# EAGLE board FOURCHANNEL REAY DRIVER (EAGLE 6.1)
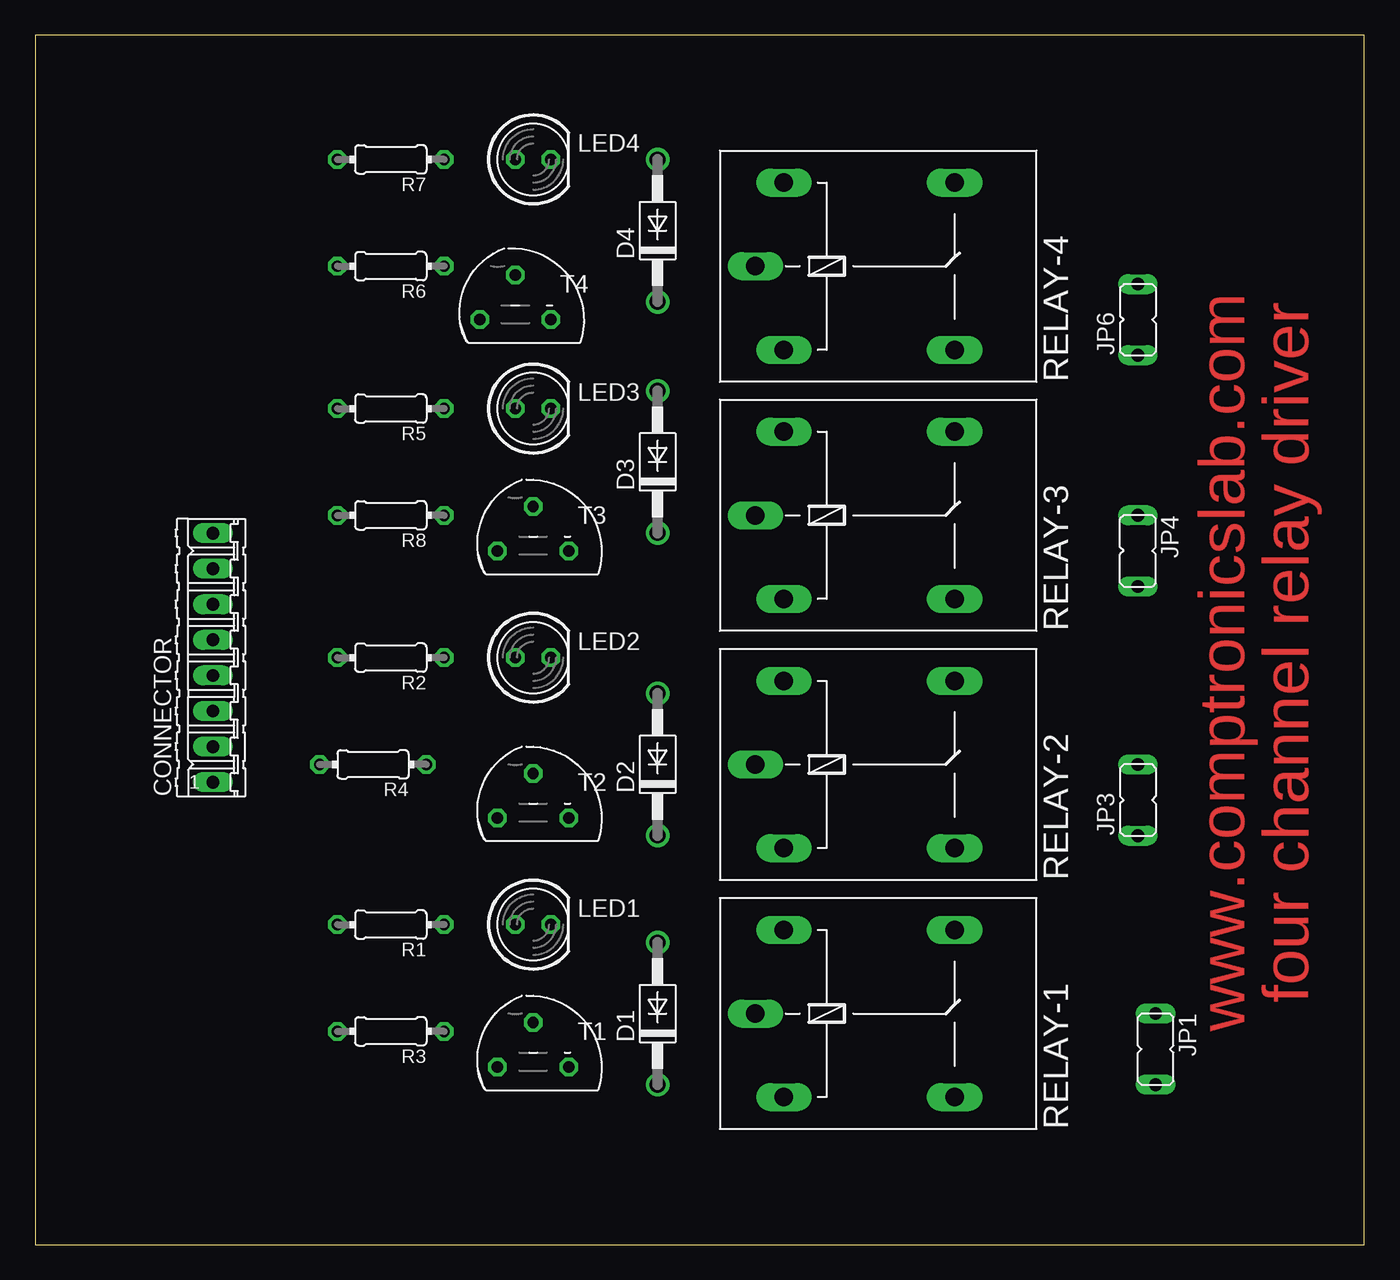
[diagram p0: board, top side]
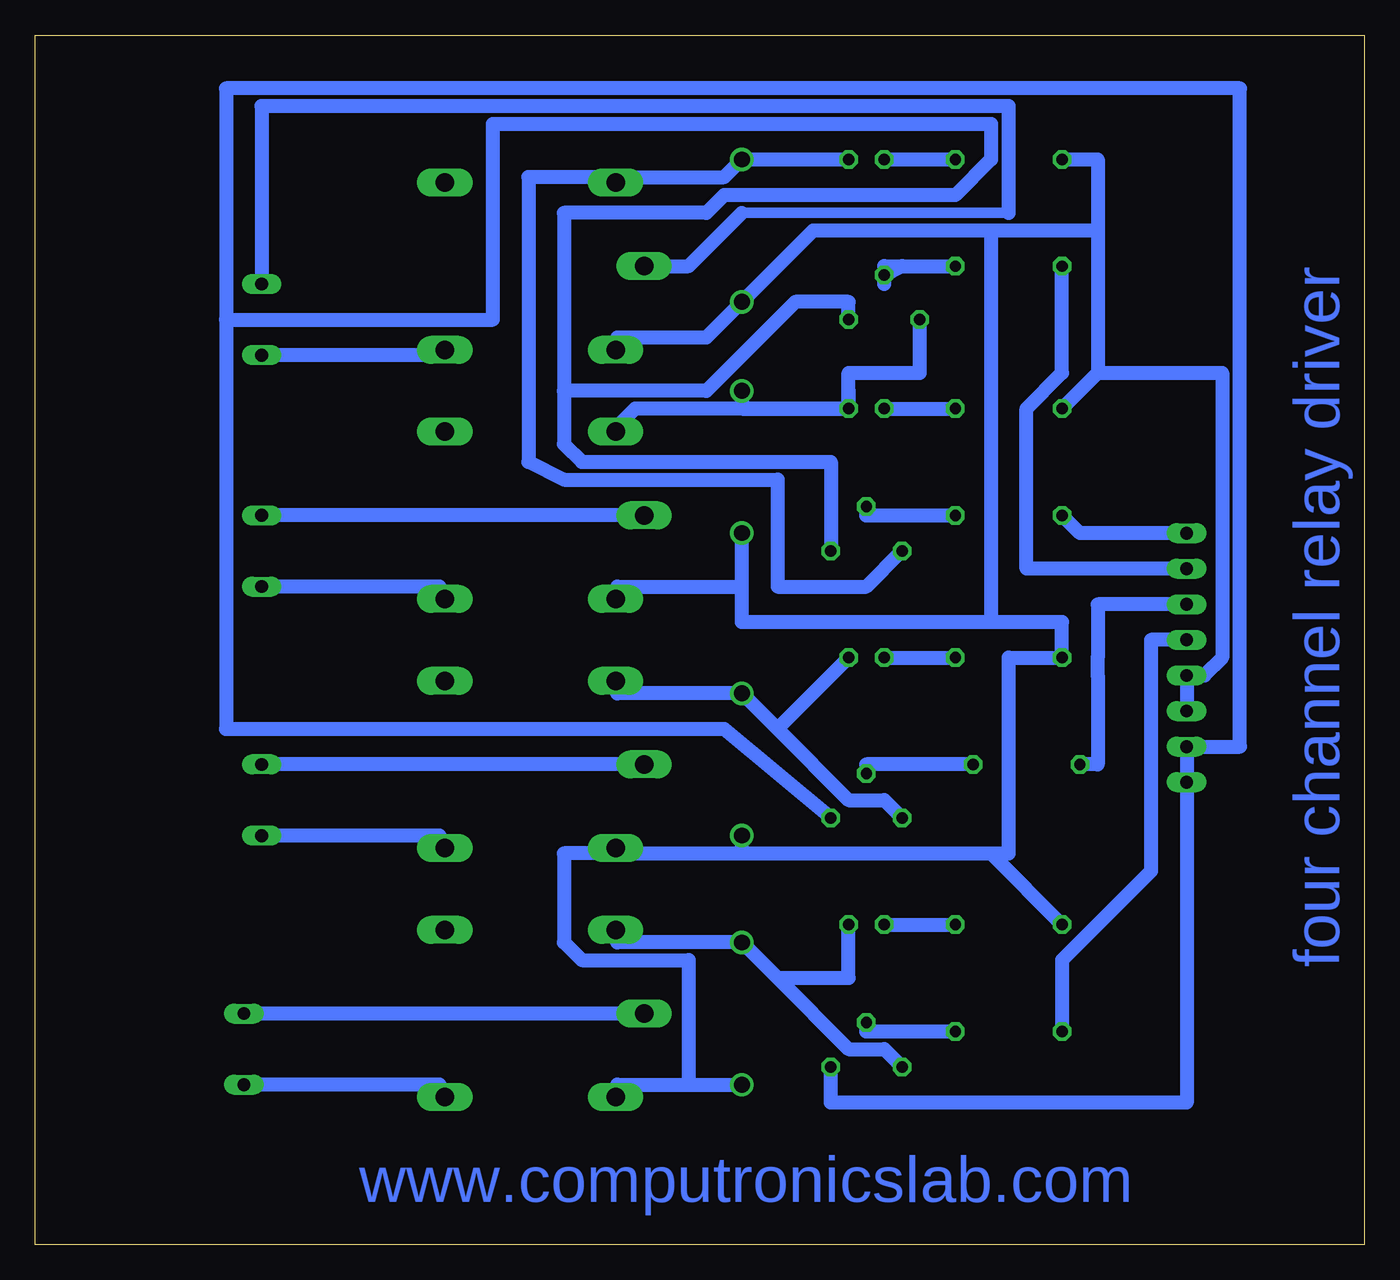
[diagram p1: board, bottom side, seen from below]

Size 94.92 x 86.35 mm. Coordinates in mm from the lower left corner, seen from the top.
Outline: 0,0 94.92,0 94.92,86.35 0,86.35 0,0
Copper layers (1*16): Top 0.035mm / dielectric 1.5mm / Bottom 0.035mm
Design rules: minimum track width 40mil, minimum drill 24mil, track to track 8mil, track to pad 8mil, pad to pad 8mil, via to via 8mil, smd to smd 8mil, copper to edge 40mil, drill to drill 8mil, minimum pad ring 10mil, minimum via ring 8mil, stop-mask expansion 4mil, vias tented up to drill 0mil, thermal gap 10mil

## Footprints (pad centres in the part's own frame; a part is rotated, then mirrored left to right if it is on the bottom)
08P = drill 0.914 long: 1 -8.89,0; 2 -6.35,0; 3 -3.81,0; 4 -1.27,0; 5 1.27,0; 6 3.81,0; 7 6.35,0; 8 8.89,0
DO41-10 = drill 1.118: A 5.08,0; C -5.08,0
JP1 = drill 0.914 long: 1 0,-2.54; 2 0,2.54
LED5MM = drill 0.813 octagon: A -1.27,0; K 1.27,0
0204/7 = drill 0.813 octagon: 1 -3.81,0; 2 3.81,0
G5LE = drill 1.321 long: 1 -7.493,-5.969; 2 -7.493,5.969; O 4.699,5.969; P -9.525,0; S 4.699,-5.969
TO92 = drill 0.813 octagon: 1 2.54,-1.27; 2 0,1.905; 3 -2.54,-1.27

## Placement (x,y rotation side)
CONNECTOR  8 PIN  [08P]  12.7,41.91 90 top
D1  1N4007  [DO41-10]  44.45,16.51 90 top
D2  1N4007  [DO41-10]  44.45,34.29 90 top
D3  1N4007  [DO41-10]  44.45,55.88 90 top
D4  1N4007  [DO41-10]  44.45,72.39 90 top
JP1  AC CONNECTOR  [JP1]  80.01,13.97 180 top
JP3  AC CONNECTOR  [JP1]  78.74,31.75 0 top
JP4  AC CONNECTOR  [JP1]  78.74,49.53 180 top
JP6  AC CONNECTOR  [JP1]  78.74,66.04 0 top
LED1  5MM  [LED5MM]  35.56,22.86 0 top
LED2  5MM  [LED5MM]  35.56,41.91 0 top
LED3  5MM  [LED5MM]  35.56,59.69 0 top
LED4  5MM  [LED5MM]  35.56,77.47 0 top
R1  1K  [0204/7]  25.4,22.86 180 top
R2  1K  [0204/7]  25.4,41.91 180 top
R3  5.6K  [0204/7]  25.4,15.24 180 top
R4  5.6K  [0204/7]  24.13,34.29 180 top
R5  1K  [0204/7]  25.4,59.69 180 top
R6  5.6K  [0204/7]  25.4,69.85 180 top
R7  1K  [0204/7]  25.4,77.47 180 top
R8  5.6K  [0204/7]  25.4,52.07 180 top
RELAY-1  12V  [G5LE]  60.96,16.51 0 top
RELAY-2  12V  [G5LE]  60.96,34.29 0 top
RELAY-3  12V  [G5LE]  60.96,52.07 0 top
RELAY-4  12V  [G5LE]  60.96,69.85 0 top
T1  BC547  [TO92]  35.56,13.97 0 top
T2  BC547  [TO92]  35.56,31.75 0 top
T3  BC547  [TO92]  35.56,50.8 0 top
T4  BC547  [TO92]  34.29,67.31 0 top

## Library data of the parts
CONNECTOR = con-amp-quick; OC_FARNELL: unknown; OC_NEWARK: unknown
D1-D4 = diode
JP1 JP3 JP4 JP6 = jumper
LED1-LED4 = led
R1-R8 = rcl
RELAY-1-RELAY-4 = relay; OC_FARNELL: unknown; OC_NEWARK: unknown
T1-T4 = transistor

## Nets
N$1: D1.A LED1.K RELAY-1.2 T1.3
N$3: D3.A LED3.K RELAY-3.2 T4.3
N$4: CONNECTOR.3 CONNECTOR.4 D1.C D2.C D3.C D4.C R1.2 R2.2 R5.2 R7.2 RELAY-1.1 RELAY-2.1 RELAY-3.1 RELAY-4.1
N$5: R4.1 T2.2
N$6: R3.1 T1.2
N$7: LED1.A R1.1
N$8: LED2.A R2.1
N$9: JP1.2 RELAY-1.S
N$10: JP1.1 RELAY-1.P
N$12: JP3.1 RELAY-2.S
N$13: JP3.2 RELAY-2.P
N$15: R8.1 T3.2
N$17: CONNECTOR.5 R3.2
N$18: CONNECTOR.6 R4.2
N$19: R6.1 T4.2
N$20: D2.A LED2.K RELAY-2.2 T2.3
N$21: LED3.A R5.1
N$22: LED4.A R7.1
N$23: JP4.2 RELAY-3.S
N$24: JP4.1 RELAY-3.P
N$26: JP6.1 RELAY-4.S
N$27: JP6.2 RELAY-4.P
N$29: CONNECTOR.1 CONNECTOR.2 T1.1 T2.1 T3.1 T4.1
N$30: CONNECTOR.7 R6.2
N$31: CONNECTOR.8 R8.2
N$32: D4.A LED4.K RELAY-4.2 T3.3

## Tracks (layer width: path | path; a pad name or v marks a point on that pad's centre or on a via)
N$1
  Bottom 1.016: T1.3 34.29,13.97 36.83,13.97 41.91,19.05 | 41.91,19.05 D1.A 53.34,21.59 RELAY-1.2 | 41.91,19.05 36.83,19.05 LED1.K
N$3
  Bottom 1.016: 36.83,60.96 36.83,62.23 31.75,62.23 31.75,63.5 T4.3 | D3.A 44.45,59.69 LED3.K | LED3.K 36.83,60.96 | 36.83,60.96 LED3.K | LED3.K 52.07,59.69 53.34,58.42 RELAY-3.2
N$4
  Bottom 1.016: 44.45,46.99 53.34,46.99 RELAY-3.1 | 48.26,11.43 53.34,11.43 RELAY-1.1 | 48.26,11.43 D1.C | 26.67,27.94 R1.2 | 44.45,27.94 53.34,27.94 RELAY-2.1 54.61,27.94 57.15,27.94 57.15,21.59 55.88,20.32 48.26,20.32 48.26,11.43 | 44.45,27.94 26.67,27.94 | 26.67,27.94 25.4,27.94 25.4,41.91 R2.2 21.59,44.45 26.67,44.45 | 44.45,27.94 D2.C | RELAY-4.1 53.34,64.77 46.99,64.77 D4.C 39.37,72.39 26.67,72.39 | CONNECTOR.3 CONNECTOR.4 11.43,40.64 10.16,41.91 10.16,62.23 19.05,62.23 | 19.05,62.23 R5.2 | 19.05,72.39 19.05,77.47 R7.2 | 19.05,72.39 19.05,62.23 | 19.05,72.39 26.67,72.39 | 44.45,46.99 44.45,44.45 26.67,44.45 | 44.45,46.99 D3.C | 26.67,72.39 26.67,44.45
N$5
  Bottom 1.016: R4.1 35.56,34.29 T2.2
N$6
  Bottom 1.016: R3.1 35.56,15.24 T1.2
N$7
  Bottom 1.016: LED1.A R1.1
N$8
  Bottom 1.016: LED2.A R2.1
N$9
  Bottom 1.016: JP1.2 66.04,11.43 RELAY-1.S
N$10
  Bottom 1.016: RELAY-1.P JP1.1
N$12
  Bottom 1.016: JP3.1 66.04,29.21 RELAY-2.S
N$13
  Bottom 1.016: RELAY-2.P JP3.2
N$15
  Bottom 1.016: R8.1 35.56,52.07 T3.2
N$17
  Bottom 1.016: R3.2 21.59,20.32 15.24,26.67 15.24,43.18 CONNECTOR.5
N$18
  Bottom 1.016: R4.2 19.05,34.29 19.05,40.64 19.05,41.91 19.05,45.72 CONNECTOR.6
N$19
  Bottom 1.016: 33.02,69.85 R6.1 | 34.29,69.85 33.02,69.85 | 33.02,69.85 T4.2 34.29,68.58
N$20
  Bottom 1.016: T2.3 34.29,31.75 36.83,31.75 41.91,36.83 | 41.91,36.83 D2.A 53.34,39.37 RELAY-2.2 | 41.91,36.83 LED2.K
N$21
  Bottom 1.016: LED3.A R5.1
N$22
  Bottom 1.016: LED4.A R7.1
N$23
  Bottom 1.016: JP4.2 66.04,46.99 RELAY-3.S
N$24
  Bottom 1.016: RELAY-3.P JP4.1
N$26
  Bottom 1.016: JP6.1 66.04,63.5 RELAY-4.S
N$27
  Bottom 0.762: 44.45,73.66 25.4,73.66
  Bottom 1.016: JP6.2 78.74,81.28 25.4,81.28 25.4,73.66 | 44.45,73.66 48.26,69.85 RELAY-4.P
N$29
  Bottom 1.016: T1.1 38.1,10.16 12.7,10.16 CONNECTOR.1 CONNECTOR.2 8.89,35.56 8.89,82.55 81.28,82.55 81.28,66.04 | T3.1 38.1,55.88 55.88,55.88 57.15,57.15 57.15,60.96 | 57.15,60.96 46.99,60.96 40.64,67.31 36.83,67.31 T4.1 | T2.1 45.72,36.83 81.28,36.83 81.28,66.04 | 57.15,60.96 57.15,73.66 46.99,73.66 45.72,74.93 29.21,74.93 26.67,77.47 26.67,80.01 62.23,80.01 62.23,66.04 81.28,66.04
N$30
  Bottom 1.016: R6.2 21.59,62.23 24.13,59.69 24.13,48.26 CONNECTOR.7
N$31
  Bottom 1.016: R8.2 20.32,50.8 CONNECTOR.8
N$32
  Bottom 1.016: LED4.K D4.A 45.72,76.2 53.34,76.2 RELAY-4.2 54.61,76.2 59.69,76.2 59.69,55.88 57.15,54.61 41.91,54.61 41.91,46.99 35.56,46.99 T3.3

## Text on the board
Top: four channel relay driver | www.comptronicslab.com
Bottom: four channel relay driver | www.computronicslab.com